# Altium PCB parsa_nami.PcbDoc (part 1 of 3)
Units mm, origin at the board's own origin, x right, y up, seen from the top; angles counter-clockwise.
Board outline 98.55 x 75.06 mm, 2 copper layers (Top Layer, Bottom Layer); 28 components, 23 nets, 118 pads, 19 vias.
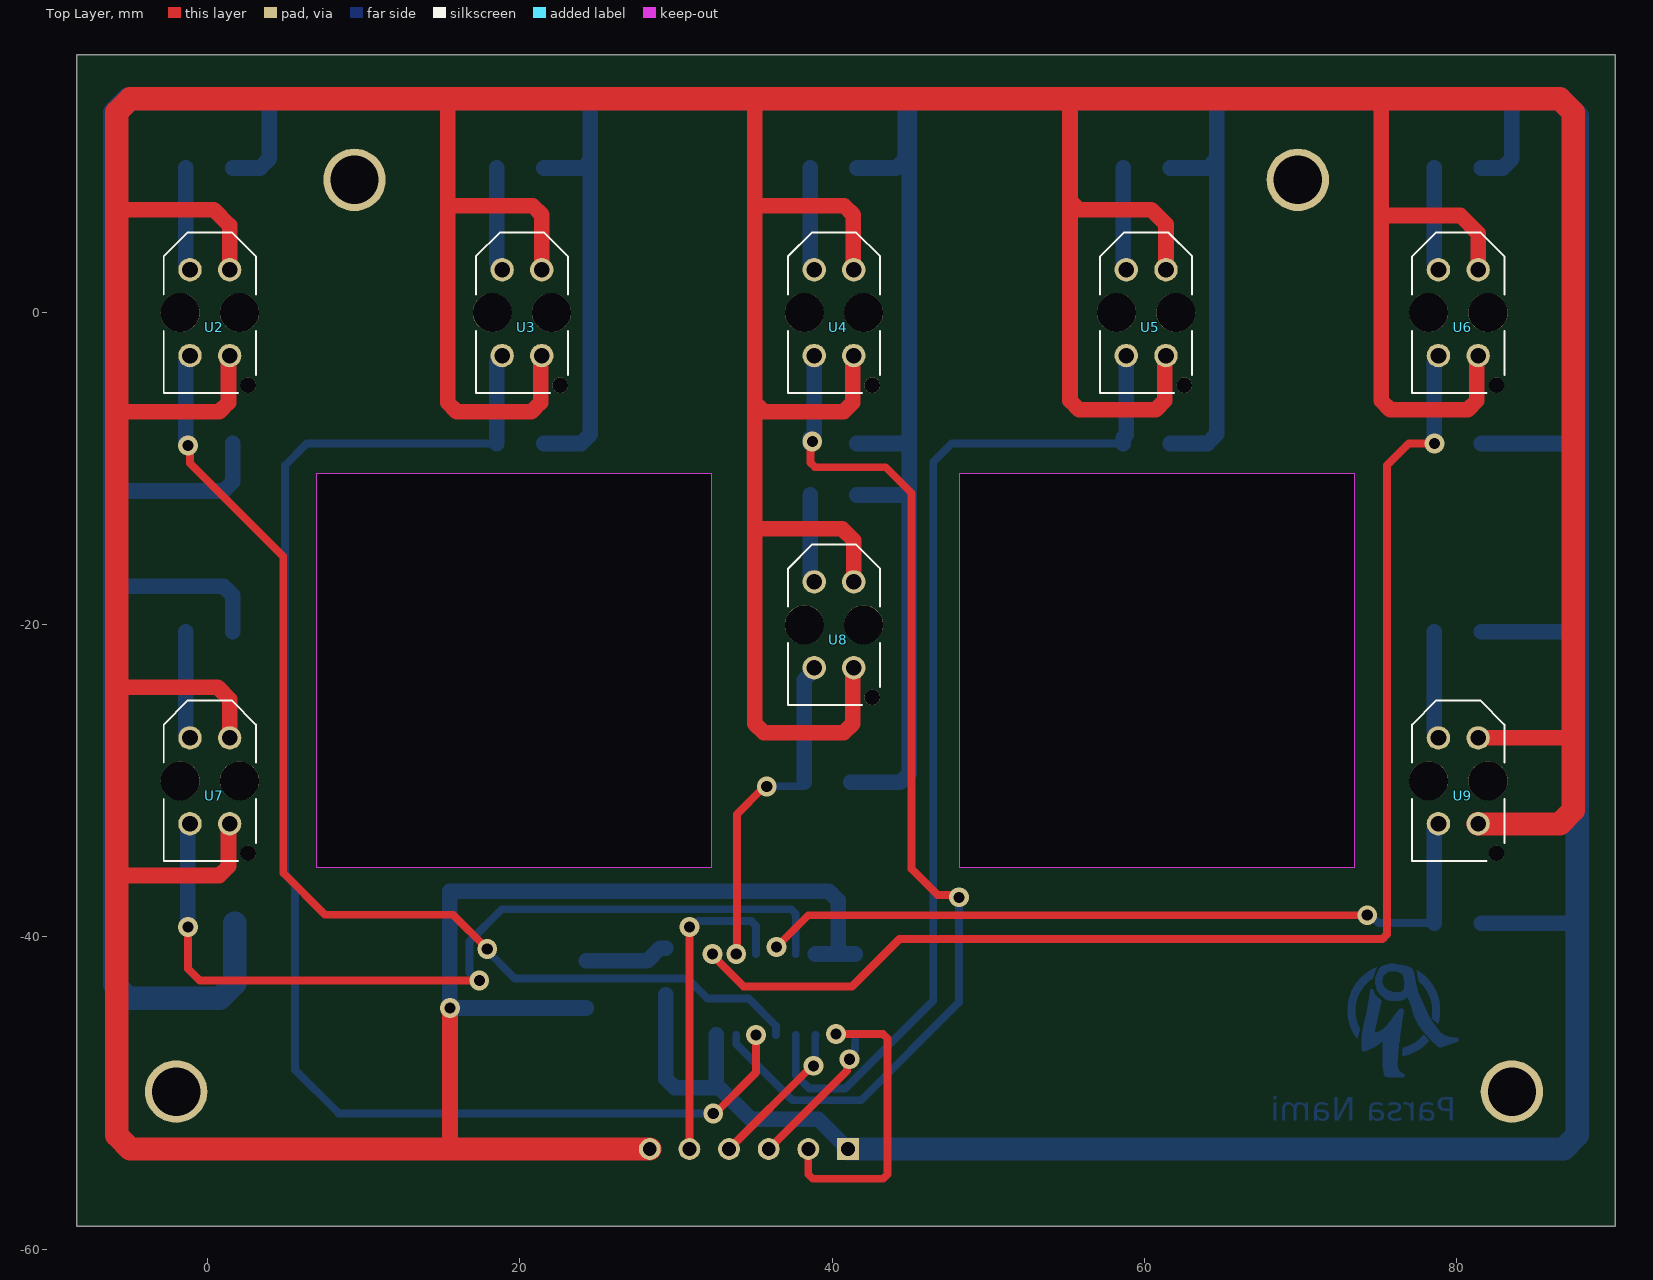
[diagram p0: Top Layer view]
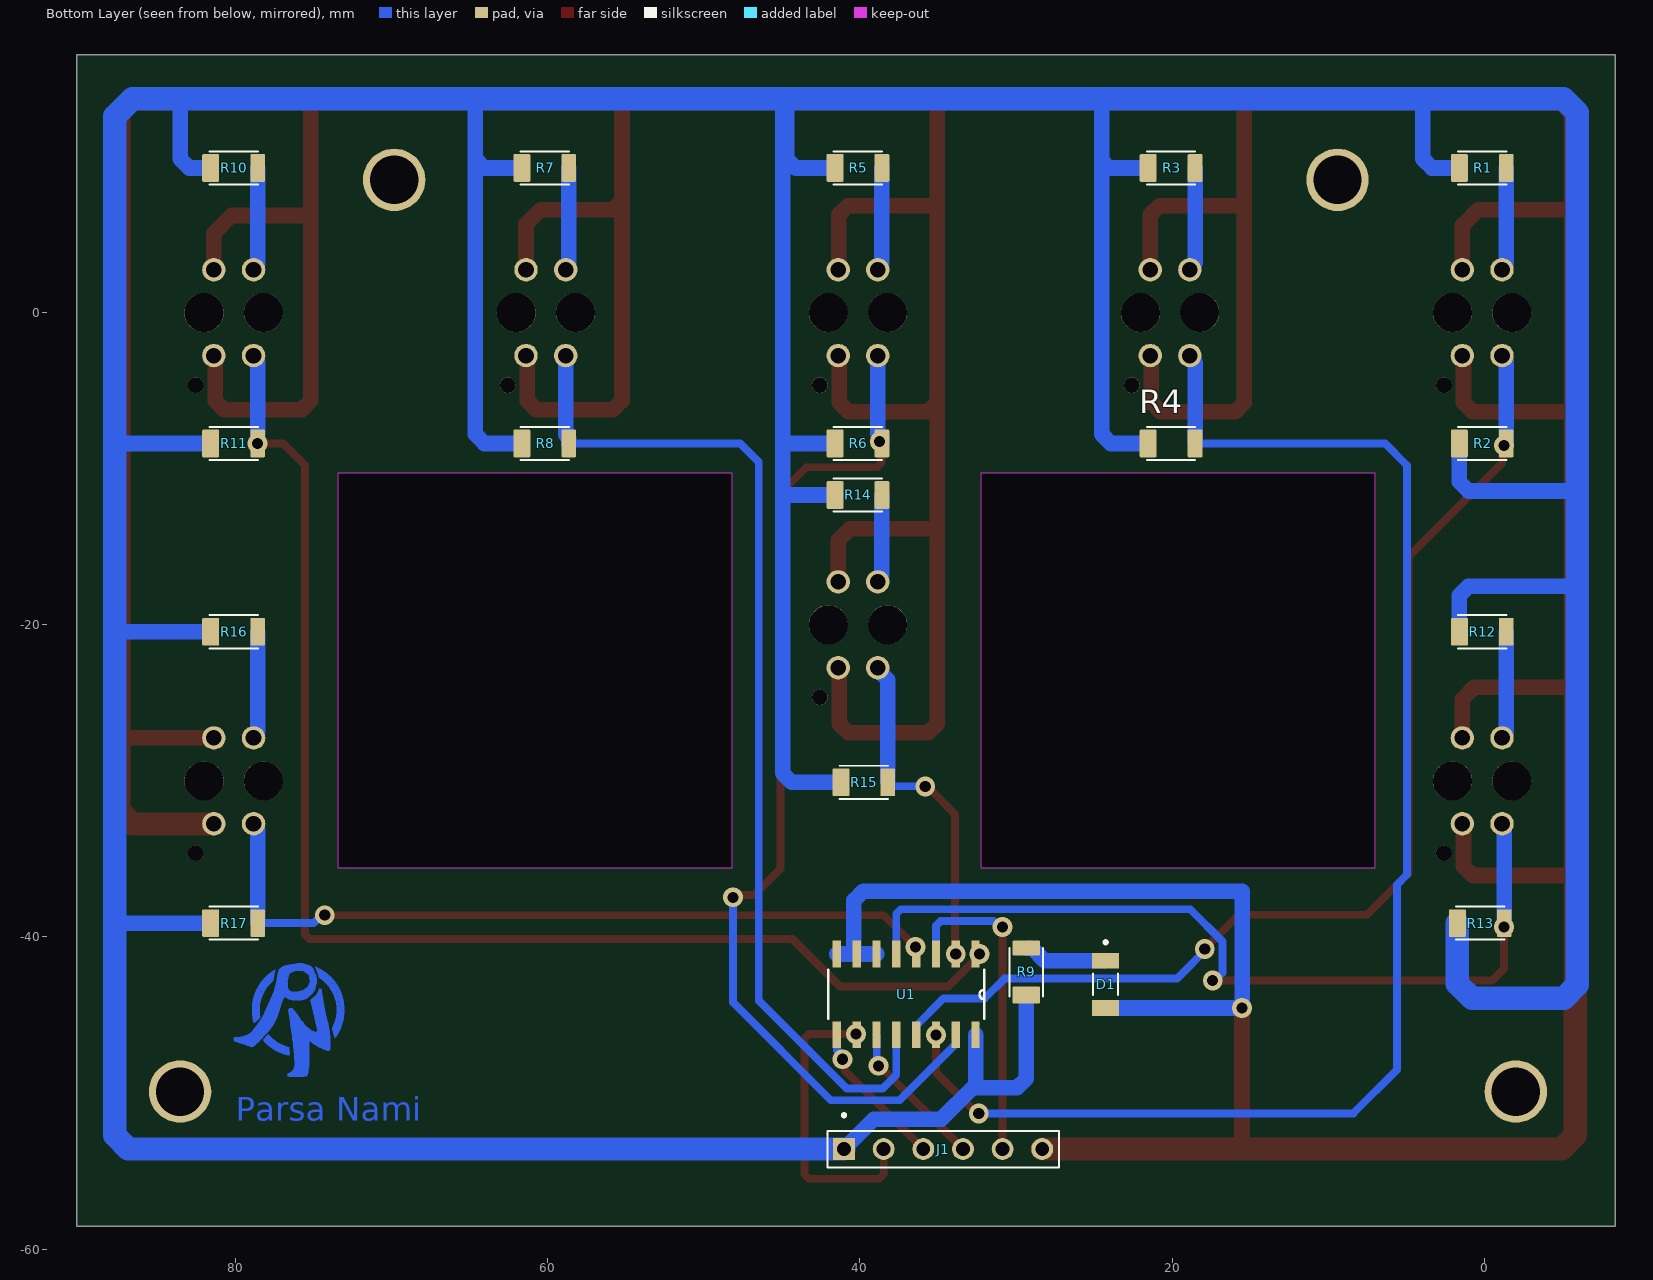
[diagram p1: Bottom Layer view, seen from below]
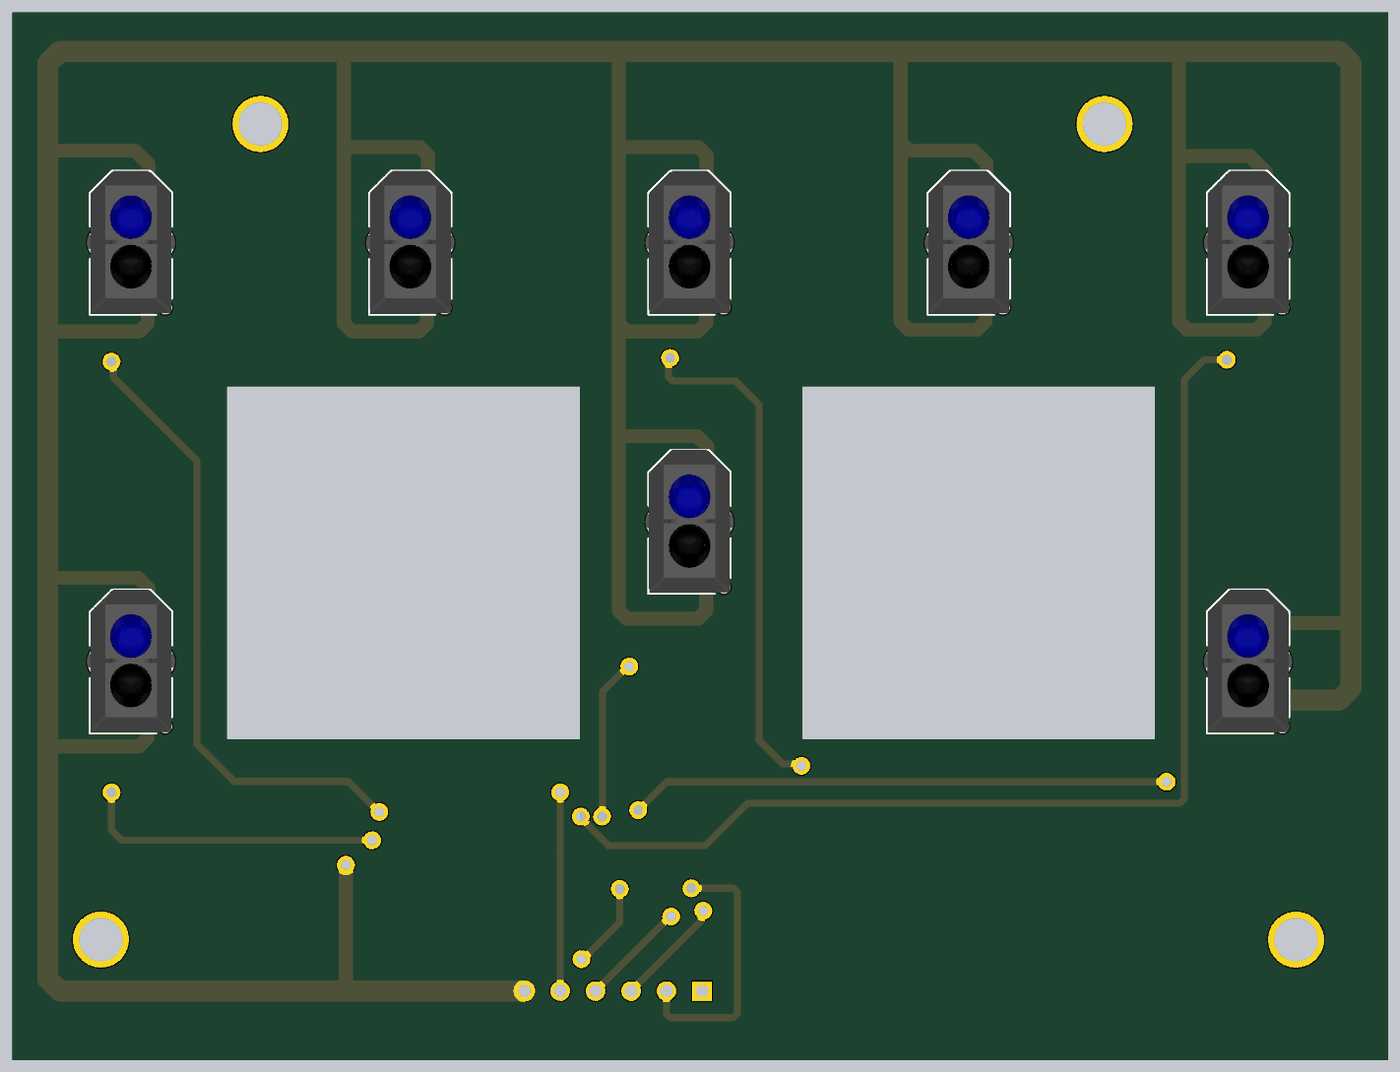
[diagram p4: 3D render of the assembled board from above, using the file's embedded part models]
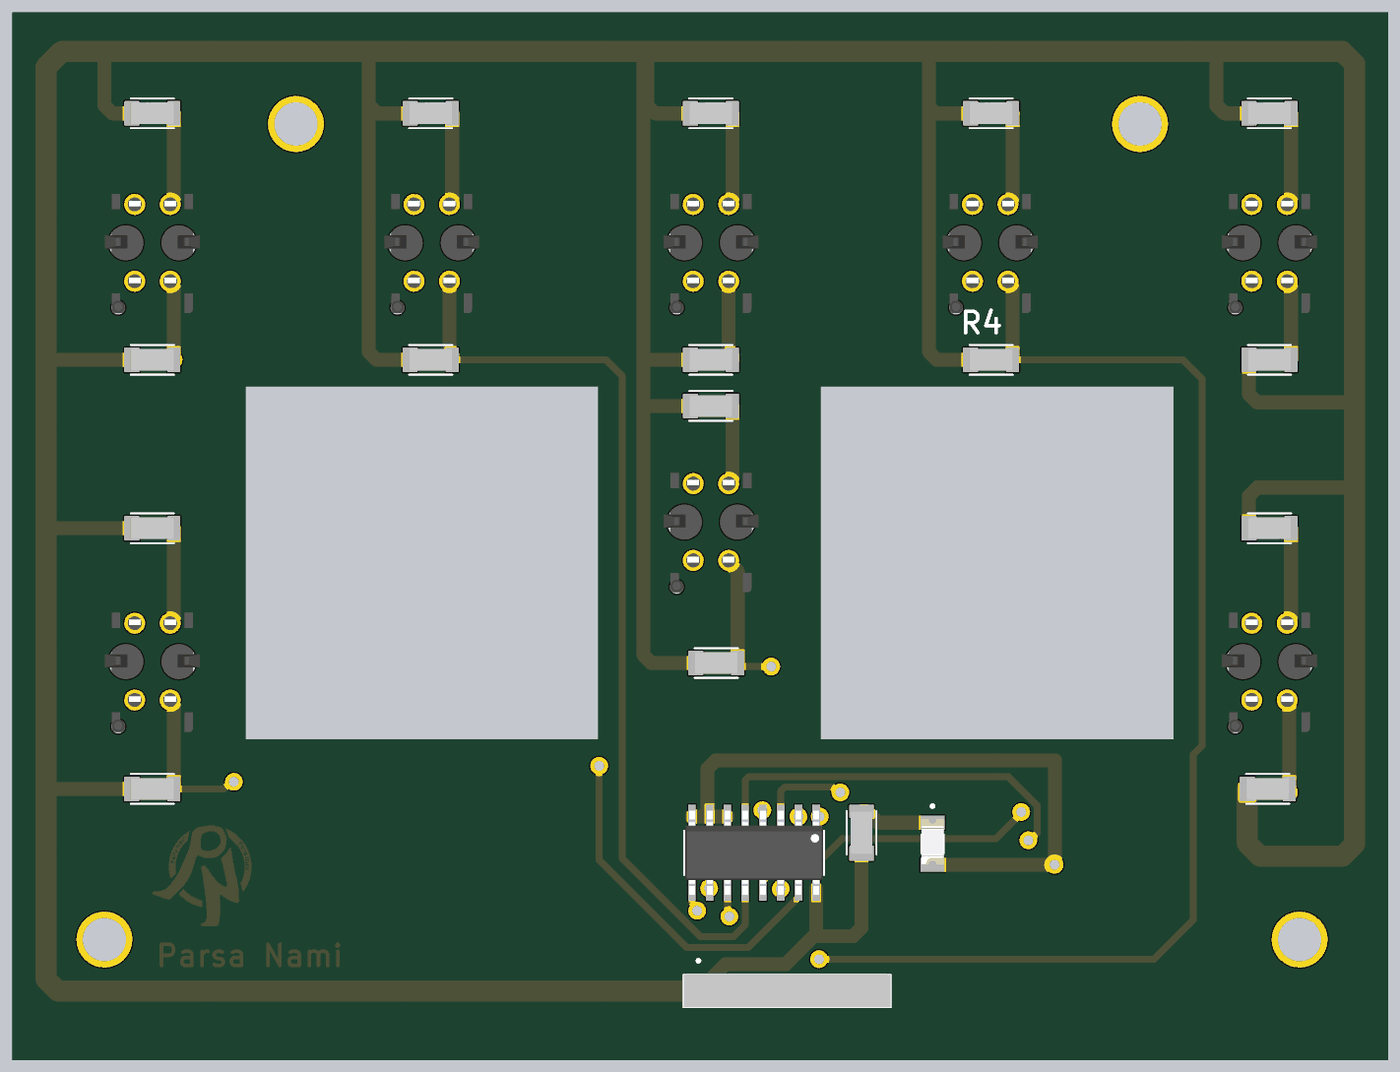
[diagram p5: 3D render of the assembled board from below, using the file's embedded part models]

## Layer stack, top to bottom
Top Solder: solder mask 0.0102, Solder Resist, Dk 3.5
Top Layer: signal copper 0.0356
Dielectric 1: dielectric 0.32, FR-4, Dk 4.8
Bottom Layer: signal copper 0.0356
Bottom Solder: solder mask 0.0102, Solder Resist, Dk 3.5

## Board outline
-8.382,-58.547 90.17,-58.547 90.17,16.51 -8.382,16.51 -8.382,-57.404
cut-out: 6.985,-35.56 6.985,-10.287 32.258,-10.287 32.258,-35.56
cut-out: 48.197,-35.56 48.197,-10.287 73.469,-10.287 73.469,-35.56

## Design rules (kind name [scope] priority, off if disabled: settings)
Clearance [All] p1: gap=0.254 ignorepadtopadclearanceinfootprint=FALSE except(0: Arc-Hole Track-Hole SMDPad-Hole THPad-Hole Via-Hole Fill-Hole Poly-Hole Region-Hole Text-Hole)
PolygonConnect [All] p1: connectstyle=Relief reliefconductorwidth=0.254 reliefentries=4 polygonreliefangle="90 Angle" airgapwidth=0.254
RoutingVias [All] p1: holewidth=0.711 width=1.27 viastyle="Through Hole" minholewidth=0.711 minwidth=1.27 maxholewidth=0.711 maxwidth=1.27
SolderMaskExpansion [All] p1: expansion=0.102 istentingtop=FALSE
Width [All] p1: maxlimit=1.5 minlimit=0.5 preferedwidth=1 minimp=50.000000 maximp=50.000000 favimp=50.000000
30 further rules are at their usual default settings.

## Components (designator, comment, footprint, x,y, rotation, side; value= is the part's Value field where it differs from the comment)
D1 "LHN974_RED_LED_1206" LEDC3216X120N 24.257,-43.045 r270 bottom
J1 "103321-6" TE_103321-6 34.671,-53.594 r180 bottom
R1 "2-1879462-9" RESC3115X65N 0.127,9.271 r180 bottom
R2 "2-1879462-9" RESC3115X65N 0.127,-8.382 r180 bottom
R3 "2-1879462-9" RESC3115X65N 20.066,9.271 r180 bottom
R4 "2-1879462-9" RESC3115X65N 20.066,-8.382 r180 bottom
R5 "2-1879462-9" RESC3115X65N 40.132,9.271 r180 bottom
R6 "2-1879462-9" RESC3115X65N 40.132,-8.382 r180 bottom
R7 "2-1879462-9" RESC3115X65N 60.198,9.271 r180 bottom
R8 "2-1879462-9" RESC3115X65N 60.198,-8.382 r180 bottom
R9 "2-1879462-9" RESC3115X65N 29.337,-42.256 r90 bottom
R10 "2-1879462-9" RESC3115X65N 80.137,9.271 r180 bottom
R11 "2-1879462-9" RESC3115X65N 80.137,-8.382 r180 bottom
R12 "2-1879462-9" RESC3115X65N 0.127,-20.447 r180 bottom
R13 "2-1879462-9" RESC3115X65N 0.254,-39.116 r180 bottom
R14 "2-1879462-9" RESC3115X65N 40.132,-11.684 r180 bottom
R15 "2-1879462-9" RESC3115X65N 39.751,-30.099 r180 bottom
R16 "2-1879462-9" RESC3115X65N 80.137,-20.447 r180 bottom
R17 "2-1879462-9" RESC3115X65N 80.137,-39.116 r180 bottom
U1 "74HC4051D" SOIC127P600X175-16N 37.037,-43.688 r270 bottom
U2 "TCRT5000" OPTO_TCRT5000 0.127,0 r90 top
U3 "TCRT5000" OPTO_TCRT5000 20.127,0 r90 top
U4 "TCRT5000" OPTO_TCRT5000 40.127,0 r90 top
U5 "TCRT5000" OPTO_TCRT5000 60.127,0 r90 top
U6 "TCRT5000" OPTO_TCRT5000 80.127,0 r90 top
U7 "TCRT5000" OPTO_TCRT5000 0.127,-30 r90 top
U8 "TCRT5000" OPTO_TCRT5000 40.127,-20 r90 top
U9 "TCRT5000" OPTO_TCRT5000 80.127,-30 r90 top

## Footprints (in the part's own frame and the unit in brackets; to place one, negate y for a bottom-side part, rotate by r counter-clockwise, add the part's x,y. Pads: shape width x height; smd on the part's side, far side on the other; paste and mask are expansions set on the pad)
LEDC3216X120N [mm]
  rect 1.01x1.73 smd: NEG(1.51,0) POS(-1.51,0)
  silkscreen extent -2.8,-0.8 0.68,0.8, body extent -1.73,-0.8 1.47,0.8, height 1.2
OPTO_TCRT5000 [mm]
  round 1.5 hole 1: A(2.75,1.27) CATH(2.75,-1.27) COLL(-2.75,1.27) E(-2.75,-1.27)
  round 1 hole 1 unplated: ""(-4.65,-2.45)
  round 2.5 hole 2.5 unplated: ""(0,1.9) ""(0,-1.9)
  silkscreen extent -5.15,-2.95 5.15,2.95, body extent -5.04,-3.4 5.16,3.4, height 6.7
RESC3115X65N [mm]
  rrect14% 1.09x1.77 smd: 1(-1.465,0)
  rrect14% 0.94x1.77 smd: 2(1.54,0)
  silkscreen extent -1.55,-1.06 1.55,1.06, body extent -1.55,-0.77 1.55,0.77, height 0.56
SOIC127P600X175-16N [mil]
  rect 67x21 smd: 1(-102,175) 2(-102,125) 3(-102,75) 4(-102,25) 5(-102,-25) 6(-102,-75) 7(-102,-125) 8(-102,-175) 9(102,-175) 10(102,-125) 11(102,-75) 12(102,-25) 13(102,25) 14(102,75) 15(102,125) 16(102,175)
  silkscreen extent -62,-197 62,197, body extent -118,-195 118,195, height 69
TE_103321-6 [mm]
  rect 1.398x1.398 hole 0.89: 1(-6.35,0)
  round 1.398 hole 0.89: 2(-3.81,0) 3(-1.27,0) 4(1.27,0) 5(3.81,0) 6(6.35,0)
  silkscreen extent -7.42,-1.17 7.42,2.27, body extent -7.42,-1.17 7.42,1.17, height 10.58

## Part data
D1: "2.6 V Red LED SMD", Package=None, Availability="Not in stock", Check_prices=https://www.snapeda.com/parts/LHN974%20RED%20LED%201206/Osram/view-part/7899607/?ref=eda, MF=Osram, MP="LHN974 RED LED 1206", Price=None, SnapEDA_Link=https://www.snapeda.com/parts/LHN974%20RED%20LED%201206/Osram/view-part/7899607/?ref=snap
J1: "Pin 06 MODII HDR SRST B / A .100CL 6 POS", Package=None, Availability=Unavailable, MF="TE Connectivity", Mouser-Purchase-URL=https://snapeda.com/shop?store=Mouser&id=4238467, MP=103321-6, Price=None, SnapEDA_Link=https://www.snapeda.com/parts/103321-6/TE%20Connectivity/view-part/4238467/?ref=snap
R1 R2 R3 R4 R5 R6 R7 R8 R9 R10 R11 R12 R13 R14 R15 R16 R17: "RES 0.24 OHM 1% 1/4W 1206", Package=1206, Power_Rating=".25 W", Resistance=24, Tolerance=1%, Availability=Unavailable, EU_RoHS_Compliance="Compliant with Exemptions", MF="TE Connectivity", MP=2-1879462-9, Price=None, SnapEDA_Link=https://www.snapeda.com/parts/2-1879462-9/TE%20Connectivity/view-part/2213899/?ref=snap
U1: "1 Circuit IC Switch 8:1 130Ohm 16-SOIC", Package="SOIC-16 Toshiba", Availability="In Stock", Check_prices=https://www.snapeda.com/parts/74HC4051D/Toshiba/view-part/?ref=eda, MF=Toshiba, MP=74HC4051D, Price=None, Purchase-URL=https://pricing.snapeda.com/search/part/74HC4051D/?ref=eda, SnapEDA_Link=https://www.snapeda.com/parts/74HC4051D/Toshiba/view-part/?ref=snap
U2 U3 U4 U5 U6 U7 U8 U9: "950 nm 60 mA Through Hole Reflective Optical Sensor with Transistor Output", Package=None, Availability=Unavailable, MP=TCRT5000, Price=None

## Free pads (board coordinates)
  round 4 hole 3.1: 2(83.566,-49.911) 3(-2.032,-49.911) 4(69.85,8.509) 5(9.398,8.509)

## Via types
v1: diameter 1.27, hole 0.711, Top Layer to Bottom Layer, 19 vias

## Nets (pads, with @x,y where several pads share a name; then routed paths per layer and width w, separated by ;. In a path a pad name is that pad's centre, name@x,y a point inside that pad or via, vN(x,y) a via of type N, cw(c..) or ccw(c..) an arc to the next point about the centre after c; other vN are vias at no path point)
+5: J1.1 R1.1 R2.1 R3.1 R4.1 R5.1 R6.1 R7.1 R8.1 R9.1 R10.1 R11.1 R12.1 R13.1 R14.1 R15.1 R16.1 R17.1 U1.16 | length 466.4
  Bottom Layer w1: -5.969,-17.653 -5.842,-17.526 1.006,-17.526 1.592,-18.112 R12.1@1.592,-20.447 ; -5.969,-11.43 1.006,-11.43 1.592,-10.844 R2.1@1.592,-8.382 ; R1.1@1.592,9.271 3.351,9.271 3.937,9.857 3.937,13.716 ; R4.1@21.531,-8.382 23.925,-8.382 24.511,-7.796 24.511,9.73 ; R3.1@21.531,9.271 24.052,9.271 24.511,9.73 ; 24.638,13.716 24.511,13.589 24.511,9.73 ; R9.1@29.337,-43.721 29.337,-49.071 29.923,-49.657 32.766,-49.657 ; U1.16@32.592,-46.279 32.592,-49.483 32.766,-49.657 ; J1.1@41.021,-53.594 39.104,-51.677 34.786,-51.677 32.766,-49.657 ; R15.1@41.216,-30.099 44.372,-30.099 44.958,-29.513 44.958,-11.557 ; R14.1@41.597,-11.684 44.831,-11.684 44.958,-11.557 ; R6.1@41.597,-8.382 44.831,-8.382 44.958,-8.509 ; R5.1@41.597,9.271 44.118,9.271 44.704,9.857 44.704,13.716 44.958,13.462 44.958,-8.509 ; R8.1@61.663,-8.382 64.057,-8.382 64.643,-7.796 64.643,9.857 ; R7.1@61.663,9.271 64.057,9.271 64.643,9.857 ; 64.643,13.716 64.643,9.857 ; R17.1@81.602,-39.116 87.757,-39.116 ; R16.1@81.602,-20.447 87.376,-20.447 87.757,-20.066 ; R11.1@81.602,-8.382 87.63,-8.382 87.757,-8.255 ; R10.1@81.602,9.271 82.98,9.271 83.566,9.857 83.566,13.716 ; 44.958,-11.557 44.958,-8.509
  Bottom Layer w1.5: R13.1@1.719,-39.116 1.719,-42.995 0.772,-43.942 -5.09,-43.942 -5.969,-43.063 -5.969,-17.653 -5.969,-11.43 -5.969,12.827 -5.08,13.716 3.937,13.716 24.638,13.716 44.704,13.716 64.643,13.716 83.566,13.716 86.614,13.716 87.757,12.573 87.757,-8.255 87.757,-20.066 87.757,-39.116 87.757,-52.715 86.878,-53.594 J1.1@41.021,-53.594
GND: D1.NEG J1.6 U1.6 U1.7 U1.8 U2.CATH U2.E U3.CATH U3.E U4.CATH U4.E U5.CATH U5.E U6.CATH U6.E U7.CATH U7.E U8.CATH U8.E U9.CATH U9.E | length 544.2
  Top Layer w1: -5.842,-35.941 -5.715,-36.068 0.737,-36.068 1.323,-35.482 1.323,-32.824 U7.E@1.397,-32.75 ; -5.842,-23.876 -5.715,-24.003 0.635,-24.003 1.397,-24.765 U7.CATH@1.397,-27.25 ; -5.842,-6.35 0.737,-6.35 1.323,-5.764 1.323,-2.824 U2.E@1.397,-2.75 ; -5.842,6.604 0.381,6.604 1.397,5.588 U2.CATH@1.397,2.75 ; 15.24,13.716 15.367,13.589 15.367,6.858 ; 15.494,-53.594 15.516,-53.572 v1(15.516,-44.555) ; U3.E@21.397,-2.75 21.323,-2.824 21.323,-5.764 20.737,-6.35 15.953,-6.35 15.367,-5.764 15.367,6.858 ; U3.CATH@21.397,2.75 21.397,6.272 20.811,6.858 15.367,6.858 ; 35.052,13.716 35.052,6.858 ; U8.E@41.397,-22.75 41.323,-22.824 41.323,-26.338 40.737,-26.924 35.638,-26.924 35.052,-26.338 35.052,-13.843 ; U8.CATH@41.397,-17.25 41.397,-14.6 40.64,-13.843 35.052,-13.843 ; U4.E@41.397,-2.75 41.323,-2.824 41.323,-5.764 40.737,-6.35 35.638,-6.35 35.052,-5.764 ; U4.CATH@41.397,2.75 41.355,2.792 41.355,6.272 40.769,6.858 35.052,6.858 ; 55.245,13.716 55.245,7.19 ; U5.E@61.397,-2.75 61.323,-2.824 61.323,-5.637 60.737,-6.223 55.831,-6.223 55.245,-5.637 55.245,7.19 ; U5.CATH@61.397,2.75 61.397,5.659 60.452,6.604 55.831,6.604 55.245,7.19 ; 75.057,13.716 75.184,13.589 75.184,6.35 ; U9.CATH@81.397,-27.25 87.431,-27.25 87.503,-27.178 ; U6.E@81.397,-2.75 81.323,-2.824 81.323,-5.637 80.737,-6.223 75.77,-6.223 75.184,-5.637 75.184,6.35 ; U6.CATH@81.397,2.75 81.397,5.09 80.264,6.223 75.311,6.223 75.184,6.35 ; 35.052,-13.843 35.052,-5.764 ; 35.052,-5.764 35.052,6.858
  Top Layer w1.5: J1.6@28.321,-53.594 15.494,-53.594 -4.963,-53.594 -5.842,-52.715 -5.842,-35.941 -5.842,-23.876 -5.842,-6.35 -5.842,6.604 -5.842,12.837 -4.963,13.716 15.24,13.716 35.052,13.716 55.245,13.716 75.057,13.716 86.624,13.716 87.503,12.837 87.503,-27.178 87.503,-31.887 86.624,-32.766 81.413,-32.766 U9.E@81.397,-32.75
  Bottom Layer w1: D1.NEG@24.257,-44.555 v1(15.516,-44.555) 15.494,-44.577 15.494,-37.076 39.8,-37.076 40.386,-37.662 40.386,-40.923 U1.7@40.212,-41.097 ; U1.6@38.942,-41.097 U1.7@40.212,-41.097 ; U1.8@41.482,-41.097 U1.7@40.212,-41.097
NetD1_POS: D1.POS R9.2 | length 5.4
  Bottom Layer w1: D1.POS@24.257,-41.535 28.164,-41.535 28.982,-40.716 R9.2@29.337,-40.716
NetR1_2: R1.2 U2.A | length 6.6
  Bottom Layer w1: R1.2@-1.413,9.271 -1.413,3.155 -1.143,2.885 U2.A@-1.143,2.75
NetR3_2: R3.2 U3.A | length 6.7
  Bottom Layer w1: R3.2@18.526,9.271 18.526,3.216 18.857,2.885 U3.A@18.857,2.75
NetR5_2: R5.2 U4.A | length 6.6
  Bottom Layer w1: R5.2@38.592,9.271 38.592,3.15 38.857,2.885 U4.A@38.857,2.75
NetR7_2: R7.2 U5.A | length 6.6
  Bottom Layer w1: R7.2@58.658,9.271 58.658,3.084 58.857,2.885 U5.A@58.857,2.75
NetR10_2: R10.2 U6.A | length 6.6
  Bottom Layer w1: R10.2@78.597,9.271 78.597,3.145 78.857,2.885 U6.A@78.857,2.75
NetR12_2: R12.2 U7.A | length 6.9
  Bottom Layer w1: R12.2@-1.413,-20.447 -1.413,-26.845 -1.143,-27.115 U7.A@-1.143,-27.25
NetR14_2: R14.2 U8.A | length 5.7
  Bottom Layer w1: R14.2@38.592,-11.684 38.592,-16.85 38.857,-17.115 U8.A@38.857,-17.25
NetR16_2: R16.2 U9.A | length 6.9
  Bottom Layer w1: R16.2@78.597,-20.447 78.597,-26.855 78.857,-27.115 U9.A@78.857,-27.25
OUT: J1.5 U1.3 | length 20.6
  Top Layer w0.5: J1.5@30.861,-53.594 v1(30.861,-39.366)
  Bottom Layer w0.5: v1(30.861,-39.366) 31.069,-39.366 31.446,-38.989 34.839,-38.989 35.132,-39.282 U1.3@35.132,-41.097
S0: J1.4 U1.11 | length 9.7
  Top Layer w0.5: J1.4@33.401,-53.594 38.735,-48.26 v1(38.811,-48.26)
  Bottom Layer w0.5: v1(38.811,-48.26) 38.925,-48.146 38.925,-46.296 U1.11@38.942,-46.279
S1: J1.2 U1.10 | length 19
  Top Layer w0.5: J1.2@38.481,-53.594 38.481,-55.206 38.774,-55.499 43.268,-55.499 43.561,-55.206 43.561,-46.521 43.268,-46.228 v1(40.259,-46.228)
S2: J1.3 U1.9 | length 9.6
  Top Layer w0.5: J1.3@35.941,-53.594 40.963,-48.572 40.963,-47.989 v1(41.11,-47.841)
  Bottom Layer w0.5: v1(41.11,-47.841) 41.11,-47.633 41.465,-47.278 41.465,-46.88 41.482,-46.863 U1.9@41.482,-46.279
Y0: R2.2 U1.13 U2.COLL | length 72.2
  Top Layer w0.5: v1(-1.27,-8.509) -1.143,-8.636 -1.143,-9.652 4.834,-15.629 4.834,-35.9 7.509,-38.575 15.715,-38.575 v1(17.907,-40.767)
  Bottom Layer w0.5: v1@17.653,-40.64 19.685,-42.672 30.734,-42.672 32.004,-43.942 34.649,-43.942 36.402,-45.695 U1.13@36.402,-46.279
  Bottom Layer w1: R2.2@-1.413,-8.382 -1.413,-3.155 -1.143,-2.885 U2.COLL@-1.143,-2.75
Y1: R4.2 U1.14 U3.COLL | length 93.1
  Top Layer w0.5: v1(32.385,-51.308) 32.512,-51.308 35.132,-48.688 v1(35.132,-46.279)
  Bottom Layer w0.5: R4.2@18.526,-8.382 6.35,-8.382 4.953,-9.779 4.953,-36.019 5.588,-36.654 5.588,-48.514 8.382,-51.308 v1(32.385,-51.308)
  Bottom Layer w1: R4.2@18.526,-8.382 18.526,-3.216 18.857,-2.885 U3.COLL@18.857,-2.75
Y2: R6.2 U1.15 U4.COLL | length 67.7
  Top Layer w0.5: v1(38.735,-8.255) 38.62,-8.37 38.62,-9.613 38.913,-9.906 43.434,-9.906 45.099,-11.571 45.099,-35.652 46.765,-37.318 47.986,-37.318 v1(48.133,-37.465)
  Bottom Layer w0.5: U1.15@33.862,-46.279 33.862,-46.863 37.464,-50.466 41.863,-50.466 48.133,-44.196 v1@48.133,-37.719
  Bottom Layer w1: R6.2@38.592,-8.382 38.592,-8.027 38.857,-7.762 U4.COLL@38.857,-2.75
Y3: R8.2 U1.12 U5.COLL | length 67
  Bottom Layer w0.5: U1.12@37.672,-46.279 37.672,-48.848 38.536,-49.712 40.851,-49.712 46.482,-44.08 46.482,-9.574 47.674,-8.382 R8.2@58.658,-8.382
  Bottom Layer w1: R8.2@58.658,-8.382 58.658,-8.027 58.857,-7.828 U5.COLL@58.857,-2.75
Y4: R11.2 U1.1 U6.COLL | length 85
  Top Layer w0.5: v1(32.338,-41.097) 32.338,-41.184 34.334,-43.18 41.275,-43.18 44.323,-40.132 75.272,-40.132 75.565,-39.839 75.565,-9.779 76.962,-8.382 v1(78.613,-8.382)
  Bottom Layer w1: v1(78.613,-8.382) R11.2@78.597,-8.382 78.597,-3.145 78.857,-2.885 U6.COLL@78.857,-2.75
Y5: R13.2 U1.5 U7.COLL | length 55.1
  Top Layer w0.5: v1(-1.27,-39.37) -1.27,-42.037 -0.508,-42.799 v1(17.399,-42.799)
  Bottom Layer w0.5: v1@17.145,-42.672 16.768,-42.295 16.768,-40.295 18.836,-38.227 37.379,-38.227 37.672,-38.52 U1.5@37.672,-41.097
  Bottom Layer w1: R13.2@-1.286,-39.116 -1.286,-33.028 -1.143,-32.885 U7.COLL@-1.143,-32.75
Y6: R15.2 U1.2 U8.COLL | length 21.5
  Top Layer w0.5: v1(33.862,-41.097) 33.905,-41.054 33.905,-32.135 v1@35.56,-30.48
  Bottom Layer w0.5: v1(35.814,-30.353) 37.991,-30.353 38.211,-30.133 R15.2@38.211,-30.099
  Bottom Layer w1: R15.2@38.211,-30.099 38.211,-23.531 38.857,-22.885 U8.COLL@38.857,-22.75
Y7: R17.2 U1.4 U9.COLL | length 49.7
  Top Layer w0.5: v1(36.449,-40.64) 38.481,-38.608 v1(74.295,-38.608)
  Bottom Layer w0.5: v1(74.295,-38.608) 74.503,-38.608 75.011,-39.116 R17.2@78.597,-39.116
  Bottom Layer w1: R17.2@78.597,-39.116 78.597,-33.145 78.857,-32.885 U9.COLL@78.857,-32.75
pads on no net: U2. U3. U4. U5. U6. U7. U8. U9.
copper on no net: | length 1416.4